# EAGLE board OpenServoCAN_Microcontroller_Board_V_1_0_1 (EAGLE 9.6.2)
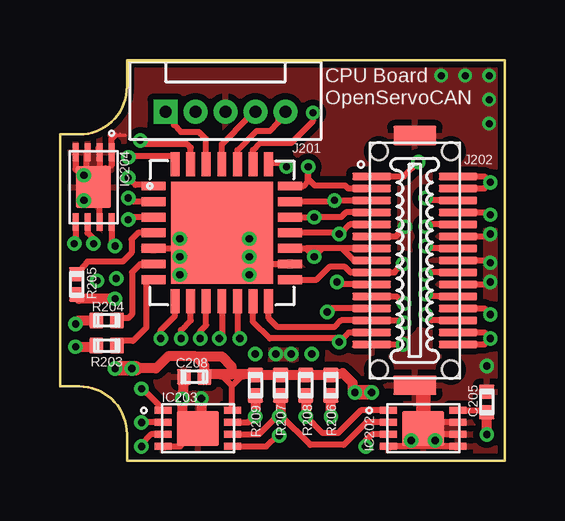
[diagram p0: board, top side]
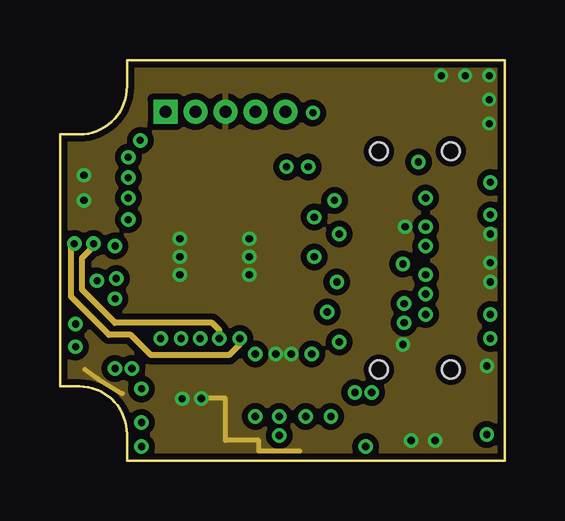
[diagram p1: board, inner layer Route2]
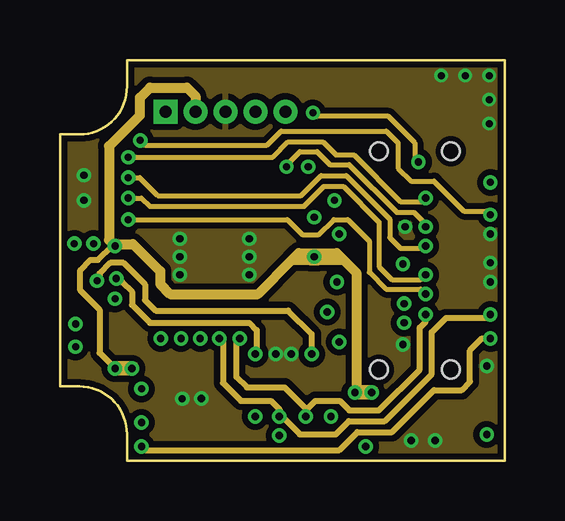
[diagram p2: board, inner layer Route15]
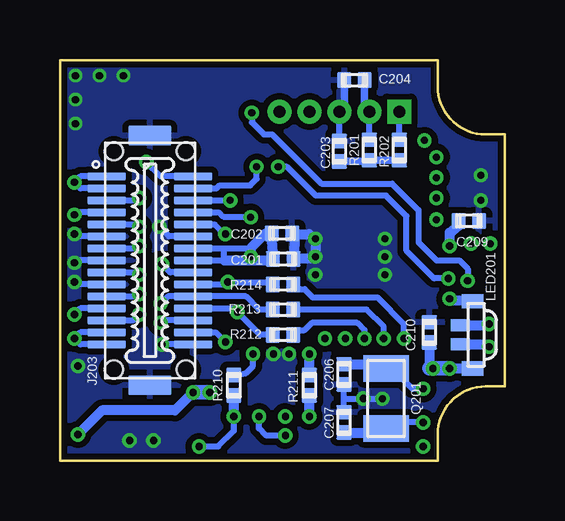
[diagram p3: board, bottom side, seen from below]

Size 18.55 x 16.7 mm. Coordinates in mm from the lower left corner, seen from the top.
Outline: 2.8,0 18.55,0 18.55,16.7 2.8,16.7 2.8,15.6 arc-90 0.8,13.6 0,13.6 0,3.1 0.8,3.1 arc-90 2.8,1.1 2.8,0
Copper layers (1+2*15+16): Top 0.018mm / dielectric 0.2mm / Route2 0.035mm / dielectric 0.36mm / Route15 0.035mm / dielectric 0.2mm / Bottom 0.018mm
Design rules "default *": minimum track width 6mil, minimum drill 0.3mm, track to track 6mil, track to pad 6mil, pad to pad 6mil, via to via 6mil, smd to smd 6mil, copper to edge 8mil, drill to drill 6mil, minimum pad ring 10mil, minimum via ring 5mil, stop-mask expansion 3mil, vias tented up to drill 15mil, thermal gap 10mil

## Footprints (pad centres in the part's own frame; a part is rotated, then mirrored left to right if it is on the bottom)
0402_C = smd 0.6 x 0.65: 1 -0.425,0; 2 0.425,0
QFN-28 = smd 1 x 0.37: 1 -2.85,1.95; 2 -2.85,1.3; 3 -2.85,0.65; 4 -2.85,0; 5 -2.85,-0.65; 6 -2.85,-1.3; 7 -2.85,-1.95; 15 2.85,-1.95; 16 2.85,-1.3; 17 2.85,-0.65; 18 2.85,0; 19 2.85,0.65; 20 2.85,1.3; 21 2.85,1.95 | smd 0.37 x 1: 8 -1.95,-2.85; 9 -1.3,-2.85; 10 -0.65,-2.85; 11 0,-2.85; 12 0.65,-2.85; 13 1.3,-2.85; 14 1.95,-2.85; 22 1.95,2.85; 23 1.3,2.85; 24 0.65,2.85; 25 0,2.85; 26 -0.65,2.85; 27 -1.3,2.85; 28 -1.95,2.85 | smd 4.25 x 4.25: EP 0,0
DFN_2X3_MICROCHIP = smd 0.75 x 0.3: 1 -1.45,0.75; 2 -1.45,0.25; 3 -1.45,-0.25; 4 -1.45,-0.75; 5 1.45,-0.75; 6 1.45,-0.25; 7 1.45,0.25; 8 1.45,0.75 | smd 1.75 x 1.45: EP 0,0
PICOBLADE-5 = drill 0.5 pad 0.813 square: 1 0,2.5 | drill 0.5 pad 0.813: 2 0,1.25; 3 0,0; 4 0,-1.25; 5 0,-2.5
10132798-30 = smd 1.6 x 0.3: 1 -1.8,3.5; 2 -1.8,3; 3 -1.8,2.5; 4 -1.8,2; 5 -1.8,1.5; 6 -1.8,1; 7 -1.8,0.5; 8 -1.8,0; 9 -1.8,-0.5; 10 -1.8,-1; 11 -1.8,-1.5; 12 -1.8,-2; 13 -1.8,-2.5; 14 -1.8,-3; 15 -1.8,-3.5; 16 1.8,-3.5; 17 1.8,-3; 18 1.8,-2.5; 19 1.8,-2; 20 1.8,-1.5; 21 1.8,-1; 22 1.8,-0.5; 23 1.8,0; 24 1.8,0.5; 25 1.8,1; 26 1.8,1.5; 27 1.8,2; 28 1.8,2.5; 29 1.8,3; 30 1.8,3.5 | smd 1.8 x 0.8: EP@2 0,-5.2; EP@↑1 0,5.2 | hole 0.75: -1.5,4.55; -1.5,-4.55
1206_RGB_LED = smd 0.8 x 0.5: 1 -0.5,-0.4; 2 -0.5,0.4 | smd 0.9 x 0.6: 3 0,-1.4; 4 0,1.4
LFXTAL009678 = smd 1.1 x 1.9: P$1 -1.25,0; P$2 1.25,0
0402_R = smd 0.6 x 0.65: 1 -0.425,0; 2 0.425,0

## Placement (x,y rotation side)
C201  100n  [0402_C]  9.24,8.41 0 bottom
C202  2u2  [0402_C]  9.29,9.48 0 bottom
C203  100n  [0402_C]  6.9,12.9 90 bottom
C204  100n  [0402_C]  6.27,15.86 180 bottom
C205  100n  [0402_C]  17.8,2.45 90 top
C206  22p  [0402_C]  6.7,3.6 270 bottom
C207  22p  [0402_C]  6.7,1.6 90 bottom
C208  100n  [0402_C]  5.6,3.5 180 top
C209  100n  [0402_C]  1.5,10 0 bottom
C210  100n  [0402_C]  3.15,5.35 90 bottom
IC201  [QFN-28]  6.75,9.5 0 top
IC202  MCP9808T-E/MC  [DFN_2X3_MICROCHIP]  15.15,1.35 0 top
IC203  MCP7940N  [DFN_2X3_MICROCHIP]  5.75,1.35 0 top
IC204  24XX64MC  [DFN_2X3_MICROCHIP]  1.4,11.4 270 top
J201  [PICOBLADE-5]  6.9,14.55 90 top
J202  1013279X-30PINR  [10132798-30]  14.8,8.35 0 top
J203  1013279X-30PINR  [10132798-30]  14.8,8.35 0 bottom
LED201  [1206_RGB_LED]  1.35,5.25 0 bottom
LOGO1  TRN_LOGO_INV  [TRN_LOGO_2020_INV]  1.3,0.85 0 top
Q201  LFXTAL009678  [LFXTAL009678]  4.95,2.6 90 bottom
R201  4k7  [0402_R]  5.65,12.95 90 bottom
R202  470  [0402_R]  4.4,12.95 270 bottom
R203  220  [0402_R]  1.95,4.8 0 top
R204  220  [0402_R]  1.95,5.85 0 top
R205  220  [0402_R]  0.7,7.35 90 top
R206  4k7  [0402_R]  11.3,3.15 90 top
R207  4k7  [0402_R]  9.2,3.15 90 top
R208  4k7  [0402_R]  10.25,3.15 90 top
R209  4k7  [0402_R]  8.15,3.15 90 top
R210  470  [0402_R]  11.3,3.15 90 bottom
R211  470  [0402_R]  8.15,3.15 90 bottom
R212  47  [0402_R]  9.25,5.25 180 bottom
R213  47  [0402_R]  9.25,6.3 0 bottom
R214  47  [0402_R]  9.25,7.35 0 bottom
U$1  CC-NC-BCNIX  [CC-NC-B_NIX]  -0.65,-16.5 0 top  (outside the outline)

## Library data of the parts
C201-C210 IC201-IC204 J201 LED201 LOGO1 Q201 R201-R214 = TRN_Open_Servo
J202 J203 = arm_project
U$1 = cc-by-nc-sa

## Nets
+3V3: J202.29 J202.30 J203.1 J203.2
+5V: C201.1 C202.1 C204.1 C205.1 C208.1 C209.1 C210.1 IC201.17 IC202.8 IC203.8 IC204.8 J201.2 J202.7 J202.8 J203.23 J203.24 LED201.3 R201.2 R206.2 R207.2 R208.2 R209.2
AN_CH_0: IC201.27 J202.27 J203.4
AN_CH_1: IC201.28 J202.28 J203.3
AN_CH_3: IC201.2 J202.22 J203.9
AN_CH_4: IC201.3 J202.20 J203.11
AUX_1: IC201.15 J202.9 J203.22
CAN_RX: IC201.13 J202.14 J203.17
CAN_TX: IC201.14 J202.13 J203.18
GND: C201.2 C202.2 C203.2 C204.2 C205.2 C206.2 C207.2 C208.2 C209.2 C210.2 IC201.5 IC201.16 IC201.EP IC202.4 IC202.5 IC202.6 IC202.7 IC202.EP IC203.4 IC203.EP IC204.1 IC204.2 IC204.3 IC204.4 IC204.7 IC204.EP J201.3 J202.6 J202.15 J202.21 J202.23 J202.25 J202.EP@2 J202.EP@↑1 J203.6 J203.8 J203.10 J203.16 J203.25 J203.EP@2 J203.EP@↑1
I2C1_SCL: IC201.11 IC202.2 IC203.6 IC204.6 J202.19 J203.12 R207.1
I2C1_SDA: IC201.12 IC202.1 IC203.5 IC204.5 J202.18 J203.13 R208.1
LED_B: IC201.7 R203.2
LED_G: IC201.6 R204.2
LED_R: IC201.4 R205.2
N$1: C203.1 R201.1 R202.2
N$2: IC201.26 J201.1 R202.1
N$3: IC201.24 J201.5
N$4: IC202.3 R206.1 R210.1
N$5: IC201.25 J201.4
N$7: LED201.2 R204.1
N$8: LED201.4 R205.1
N$9: LED201.1 R203.1
N$13: IC203.7 R209.1 R211.1
N$14: C206.1 IC203.1 Q201.P$2
N$15: C207.1 IC203.2 Q201.P$1
N$18: IC201.10 R212.1
N$19: IC201.9 R213.2
N$20: IC201.8 R214.2
POWER_EN: IC201.1 J202.24 J203.7
PWM_A: IC201.18 J202.5 J203.26
PWM_B: IC201.19 J202.4 J203.27
PWM_C: IC201.20 J202.3 J203.28
PWM_D: IC201.21 J202.2 J203.29
SPI_SCKL: J202.10 J203.21 R214.1
SPI_SDI: J202.12 J203.19 R212.2
SPI_SDO: J202.11 J203.20 R213.1
TEMP_ALRM: IC201.23 J202.1 J203.30 R210.2
TICK_ALRM: IC201.22 J202.26 J203.5 R211.2
VBAT: IC203.3 J202.16 J202.17 J203.14 J203.15

## Tracks (layer width: path | path; a pad name or v marks a point on that pad's centre or on a via)
+3V3  (via drill 0.3 pad 0.6)
  Top 0.254: J203.2 17.7,11.35 v17.95,11.6 17.7,11.85 J203.1
  Bottom 0.254: J203.2 17.7,11.35 v17.95,11.6 17.7,11.85 J203.1
+5V  (via drill 0.3 pad 0.6)
  Top 0.254: IC203.8 7.17,2.12 7.17,3.12 | 7.17,3.12 7.65,3.6 | 7.17,3.12 6.7,3.6 | IC201.17 10.25,8.85 | 10.25,8.85 v10.6,8.5 10.95,8.85 | J203.24 11.75,8.85 | 11.75,8.85 10.95,8.85 | 10.95,8.85 10.25,8.85 | J203.23 12.25,8.35 11.75,8.85 | IC204.8 2.15,9.1 v2.3,8.95 | IC202.8 17.8,2.1 C205.1
  Top 0.406: 7.15,3.6 7.65,3.6 8.1,3.6 R209.2 R207.2 R208.2 R206.2 11.8,3.65 12.2,3.25 12.2,2.95 v12.3,2.85 | 7.15,3.6 6.7,3.6 6.2,3.6 C208.1 6.02,3.97 5.65,4.35 | 3.15,3.85 4,3.85 4.5,4.35 5.65,4.35 | 5.65,4.35 6.75,4.35 7.15,3.95 7.15,3.6 | v17.8,1.1 C205.1
  Top 0.61: v2.3,3.85 v3,3.85 3.15,3.85 | v13,2.85 v12.3,2.85
  Route15 0.254: v2.3,3.85 1.65,4.5 1.65,6.3 0.85,7.1 0.85,7.95 1.27,8.37 1.59,8.37 2.17,8.95 v2.3,8.95
  Route15 0.406: v12.3,2.85 12.36,2.91 12.36,7.84 11.85,8.35 | 11.85,8.35 10.75,8.35 | 10.75,8.35 v10.6,8.5 10.45,8.35 | 10.45,8.35 9.65,8.35 | 9.65,8.35 8.25,6.95 4.6,6.95 4.18,7.37 4.18,7.9 3.05,9.03 2.38,9.03 v2.3,8.95 2.05,9.2 2.05,13.11 3.33,14.4 3.33,15.13 3.75,15.55 5.3,15.55 5.65,15.2 J201.2 | 10.45,8.35 10.75,8.35 | 9.65,8.35 9.95,8.65 11.55,8.65 11.85,8.35
  Route15 0.61: v2.3,3.85 v3,3.85 | v12.3,2.85 v13,2.85
  Bottom 0.254: J203.24 11.65,8.85 | 11.65,8.85 10.6,8.85 | J203.23 11.7,8.35 11.7,8.8 11.65,8.85 | R201.2 J201.2 5.77,14.67
  Bottom 0.305: J201.2 5.84,14.74 C204.1
  Bottom 0.406: v2.3,3.85 LED201.3 | v10.6,8.5 10.6,8.85 9.97,9.48 C202.1 9.74,9.43 C201.1 9.8,8.35 11.7,8.35 | v13,2.85 13.75,2.1 16.8,2.1 v17.8,1.1 | C210.1 3.15,3.85 | v2.3,8.95 2.3,9.51 1.93,9.81 C209.1
  Bottom 0.61: v2.3,3.85 v3,3.85 3.15,3.85 | v13,2.85 v12.3,2.85
AN_CH_0  (via drill 0.3 pad 0.6)
  Top 0.254: IC201.27 5.45,13.05 5.3,13.2 3.5,13.2 v3.35,13.35 | J203.4 17.85,10.35 v17.95,10.25
  Route15 0.203: v3.35,13.35 3.55,13.15 8.63,13.15 9.22,13.74 13.61,13.74 14.1,13.25 14.1,12.2 14.65,11.65 15.6,11.65 16.85,10.4 17.8,10.4 v17.95,10.25
  Bottom 0.254: J203.4 17.85,10.35 v17.95,10.25
AN_CH_1  (via drill 0.3 pad 0.6)
  Top 0.254: v2.85,12.65 2.9,12.7 4.7,12.7 4.8,12.6 IC201.28 | J203.3 15.35,10.85 v15.25,10.95
  Route15 0.203: v2.85,12.65 8.88,12.65 9.52,13.29 10.96,13.29 11.5,12.75 12.25,12.75 14.2,10.8 15.1,10.8 v15.25,10.95
  Bottom 0.254: J203.3 15.35,10.85 v15.25,10.95
AN_CH_3  (via drill 0.3 pad 0.6)
  Top 0.254: IC201.2 3,10.8 v2.85,10.95 | J203.9 15.35,7.85 v15.25,7.75
  Route15 0.203: v2.85,10.95 3.4,10.95 3.75,10.6 10.18,10.6 11.01,11.43 11.82,11.43 13.31,9.94 13.31,8.09 13.85,7.55 15.05,7.55 v15.25,7.75
  Bottom 0.254: J203.9 15.35,7.85 v15.25,7.75
AN_CH_4  (via drill 0.3 pad 0.6)
  Top 0.254: IC201.3 2.95,10.15 v2.85,10.05 | J203.11 15.35,6.85 v15.25,6.95
  Route15 0.203: v2.85,10.05 9.48,10.05 10.11,9.42 10.79,9.42 11.42,10.05 12,10.05 12.9,9.15 12.9,7.85 13.6,7.15 15.05,7.15 v15.25,6.95
  Bottom 0.254: J203.11 15.35,6.85 v15.25,6.95
AUX_1  (via drill 0.3 pad 0.6)
  Top 0.254: v14.3,8.2 13.95,7.85 J203.22 12.12,7.85 11.89,8.08 11.23,8.08 10.7,7.55 IC201.15
  Bottom 0.254: J203.22 13.95,7.85 v14.3,8.2
CAN_RX  (via drill 0.3 pad 0.6)
  Top 0.254: J203.17 12.05,5.35 v11.65,4.95 11.5,5.1 8.75,5.1 8.05,5.8 IC201.13
  Bottom 0.254: J203.17 12.05,5.35 v11.65,4.95
CAN_TX  (via drill 0.3 pad 0.6)
  Top 0.254: v14.35,5.75 14.25,5.85 J203.18 11.72,5.85 11.44,5.57 9.08,5.57 8.7,5.95 IC201.14
  Bottom 0.254: J203.18 14.25,5.85 v14.35,5.75
GND  (via drill 0.3, 0.3 pad 0.6)
  Top 0.152: 2.47,13.57 2.5,13.6 | IC204.2 1.55,12.95 1.55,13.05 | 2.07,13.57 2.3,13.57 2.47,13.57 | 2.47,13.57 2.72,13.57
  Top 0.254: 15.4,1.65 IC202.EP | 15.4,1.15 IC202.EP | IC202.5 IC202.4 | 14.9,0.65 14.9,1.35 IC202.EP | IC201.5 6.1,8.85 IC201.EP 8.05,8.2 IC201.16 | IC202.7 15.4,1.6 IC202.EP | IC202.6 15.4,1.1 IC202.EP | IC203.4 5,0.6 IC203.EP | J203.16 v14.3,4.85 | IC204.3 1.1,12.8 1.1,11.55 1.15,11.6 1.15,11.45 1.4,11.7 | 1.4,11.7 IC204.EP | IC204.2 1.65,11.85 | 2.15,12.3 IC204.1 2.15,13.43 2.3,13.57 | 1.9,12.2 1.4,11.7 | IC204.4 0.65,12.15 IC204.EP | IC204.7 1.65,11.15 IC204.EP | J203.25 14,9.35 v14.4,9.75 | J203.8 17.85,8.35 v17.95,8.25 | J203.10 17.85,7.35 v17.95,7.45 | J203.6 17.85,9.35 v17.95,9.45
  Top 0.406: IC203.EP 5.1,2 v5.1,2.59 C208.2 | IC203.EP 5.35,1.75 5.2,1.75 | v5.9,2.6 5.9,1.5 IC203.EP
  Top 0.61: IC202.EP 15.15,3.15 J202.EP@2
  Route2 0.2: 8.3,0.4 8.3,0.85 6.9,0.85 6.9,2.6 v5.9,2.6
  Route2 0.203: 10,0.4 8.3,0.4 | 2.6,2.8 1.6,3.4 1.05,3.8
  Bottom 0.254: C207.2 6.7,2.59 | 6.7,2.59 C206.2 | 6.7,2.59 v5.1,2.59 | J203.16 v14.3,4.85 | C203.2 J201.3 6.77,14.68 | J203.25 14,9.35 v14.4,9.75 | J203.8 17.85,8.35 v17.95,8.25 | J203.10 17.85,7.35 v17.95,7.45 | J203.6 17.85,9.35 v17.95,9.45
  Bottom 0.305: J201.3 6.69,14.75 C204.2
  Bottom 0.406: v7.9,8.5 7.91,8.41 C201.2 8.74,9.43 C202.2 8.76,9.45 8.15,9.45 v7.9,9.25 v7.9,8.5
  other vias: 5,7.75 5,8.5 5,9.25 1,10.85 1,11.9 14.65,0.85 15.65,0.85 17.8,3.95 16.9,16.05 17.9,16.05 17.9,15.05 17.9,14.05 15.9,16.05 7.9,7.75 9,4.45 9.65,4.45
  pour Route2 (isolate 0.254): 18.6,-0.05 18.6,16.75 -0.3,16.75 -0.3,-0.05
  pour Top (isolate 0.254): 18.6,-0.05 18.6,16.75 -0.2,16.75 -0.2,-0.05
  pour Bottom (isolate 0.254): 18.6,-0.05 -0.3,-0.05 -0.3,16.75 18.6,16.75
  pour Route15 (isolate 0.254): 18.6,-0.05 18.6,16.75 -0.2,16.75 -0.3,16.75 -0.3,-0.05 3.4,-0.05
I2C1_SCL  (via drill 0.3 pad 0.6)
  Top 0.254: 9.2,1.9 10.44,0.66 11.84,0.66 12.78,1.6 IC202.2 | 9.2,1.85 9.15,1.9 | IC203.6 8.3,1.1 9.05,1.85 v9.15,1.85 | IC201.11 6.75,5.2 v6.65,5.1 | J203.12 17.7,6.35 v17.95,6.1 | IC204.6 1.15,9.5 1.4,9.25 v1.4,9.05
  Top 0.406: R207.1 9.2,1.9 9.2,1.85 | 9.15,1.9 v9.15,1.85
  Route2 0.254: v6.65,5.1 6.65,5.45 6.35,5.75 2.3,5.75 0.92,7.13 0.92,8.45 1.4,8.93 v1.4,9.05
  Route15 0.254: v6.65,5.1 6.7,5.1 6.8,5 6.8,3.25 7.55,2.5 8.8,2.5 9.15,2.15 v9.15,1.85 9.25,1.85 10,1.1 11.5,1.1 12.05,1.65 13.55,1.65 15.51,3.61 15.51,5.36 16.1,5.95 17.8,5.95 v17.95,6.1
  Bottom 0.254: J203.12 17.7,6.35 v17.95,6.1
I2C1_SDA  (via drill 0.3 pad 0.6)
  Top 0.254: IC202.1 12.55,2.1 11.6,1.15 10.95,1.15 v10.25,1.85 | IC203.5 8.6,0.6 9.05,1.05 v9.15,1.05 | IC201.12 7.4,5.2 v7.5,5.1 | J203.13 15.5,5.85 v15.25,6.1 | IC204.5 0.65,9.1 v0.6,9.05
  Top 0.406: R208.1 v10.25,1.85
  Route2 0.254: v7.5,5.1 7.5,4.85 7.05,4.4 3.8,4.4 2.95,5.25 2.05,5.25 0.45,6.85 0.45,8.9 v0.6,9.05
  Route15 0.254: v7.5,5.1 7.35,4.95 7.35,3.5 7.79,3.06 9.37,3.06 10.25,2.17 v10.25,1.85 | 10.28,1.82 v10.25,1.85 | v10.25,1.85 10.25,2.1 10.65,2.5 11.67,2.5 12.07,2.1 13.3,2.1 15,3.8 15,5.55 15.25,5.8 v15.25,6.1
  Bottom 0.254: v9.15,1.05 9.95,1.05 10.25,1.35 v10.25,1.85 | J203.13 15.5,5.85 v15.25,6.1
LED_B
  Top 0.254: IC201.7 3.75,7.55 3.6,7.4 3.6,5.55 3.05,5 2.65,5 R203.2
LED_G
  Top 0.254: IC201.6 3.35,8.2 3,7.85 3,6.1 2.85,5.95 2.55,5.95 R204.2
LED_R
  Top 0.254: IC201.4 3.25,9.5 2.98,9.23 2.98,8.66 2.62,8.3 1.15,8.3 R205.2
N$1
  Bottom 0.254: R201.1 5.7,12.4
  Bottom 0.305: R202.2 R201.1 5.7,12.47 C203.1
N$2
  Top 0.254: IC201.26 6.1,13.4 5.8,13.7 5.05,13.7 4.75,14 4.75,14.2 J201.1
  Bottom 0.254: R202.1 J201.1
N$3
  Top 0.254: IC201.24 7.4,12.95 8.2,13.75 8.75,13.75 9.1,14.1 9.1,14.3 9.35,14.55 J201.5
N$4  (via drill 0.3 pad 0.6)
  Top 0.254: IC202.3 13,1.1 12.65,0.75 12.65,0.7 v12.75,0.6
  Top 0.406: v11.3,1.85 R210.1
  Bottom 0.254: v12.75,0.6 11.95,0.6 11.3,1.25 v11.3,1.85
  Bottom 0.406: v11.3,1.85 R210.1
N$5
  Top 0.254: J201.4 8,14.55 7.85,14.4 7.85,14.3 6.75,13.2 IC201.25
N$7  (via drill 0.3 pad 0.6)
  Top 0.406: v0.65,5.7 0.8,5.85 R204.1
  Bottom 0.406: LED201.2 0.7,5.65 v0.65,5.7
N$8  (via drill 0.3 pad 0.6)
  Top 0.254: R205.1 0.8,6.75
  Top 0.406: v2.3,6.75 0.8,6.75
  Bottom 0.254: 1.4,6.7 LED201.4
  Bottom 0.406: v2.3,6.75 2.25,6.7 1.4,6.7
N$9  (via drill 0.3 pad 0.6)
  Top 0.406: v0.65,4.75 1.4,4.75 R203.1
  Bottom 0.406: LED201.1 0.75,4.85 v0.65,4.75
N$13  (via drill 0.3 pad 0.6)
  Top 0.254: IC203.7 7.85,1.6 8.15,1.9 v8.15,1.85
  Top 0.406: R211.1 v8.15,1.85
  Bottom 0.406: v8.15,1.85 R211.1
N$14  (via drill 0.3 pad 0.6)
  Top 0.254: IC203.1 4.2,2.1 4.1,2.2 4.1,2.35 3.6,2.85 3.4,2.85 v3.4,3
  Bottom 0.254: v3.4,3 3.85,3 4.2,3.35 4.2,3.5 4.55,3.85 Q201.P$2 5.02,3.92 5.2,4.1
  Bottom 0.406: C206.1 5.12,4.02 5.02,3.92
N$15  (via drill 0.3 pad 0.6)
  Top 0.254: IC203.2 v3.4,1.6
  Bottom 0.254: v3.4,1.6 4.2,1.6 4.2,1.35 Q201.P$1 5.2,1.1
  Bottom 0.406: C207.1 5.12,1.17 Q201.P$1
N$18  (via drill 0.3 pad 0.6)
  Top 0.254: v5.85,5.1 5.85,5.4 6.1,5.65 IC201.10
  Bottom 0.254: v5.85,5.1 5.85,5.45 6.15,5.75 8.05,5.75 8.35,5.45 8.55,5.45 R212.1
N$19  (via drill 0.3 pad 0.6)
  Top 0.254: v5.05,5.1 5.05,5.45 5.45,5.85 IC201.9
  Bottom 0.254: v5.05,5.1 5.05,5.6 5.75,6.3 R213.2
N$20  (via drill 0.3 pad 0.6)
  Top 0.254: 4.8,6.75 IC201.8 4.8,6.05 4.2,5.45 v4.2,5.1
  Bottom 0.254: v4.2,5.1 4.2,5.7 5.3,6.8 8,6.8 8.35,7.15 8.55,7.15 R214.2
POWER_EN  (via drill 0.3 pad 0.6)
  Top 0.152: IC201.1 3.85,11.5
  Top 0.254: 3.85,11.5 3.15,11.5 v2.85,11.8 | J203.7 15.35,8.85 v15.25,8.95
  Route15 0.203: v2.85,11.8 3.32,11.8 4.08,11.05 10.06,11.05 10.89,11.89 11.94,11.89 13.75,10.07 13.75,9.3 14.2,8.85 15.15,8.85 v15.25,8.95
  Bottom 0.254: J203.7 15.35,8.85 v15.25,8.95
PWM_A  (via drill 0.3 pad 0.6)
  Top 0.254: IC201.18 11.6,9.5 v11.65,9.45 11.7,9.45 12.1,9.85 J203.26
  Bottom 0.254: J203.26 12.1,9.85 11.7,9.45 v11.65,9.45
PWM_B  (via drill 0.3 pad 0.6)
  Top 0.254: IC201.19 v10.6,10.15 11.72,10.15 11.92,10.35 J203.27
  Bottom 0.254: J203.27 11.92,10.35 11.74,10.17 10.6,10.17 v10.6,10.15
PWM_C  (via drill 0.3 pad 0.6)
  Top 0.254: IC201.20 11.4,10.8 v11.45,10.85 J203.28
  Bottom 0.254: J203.28 v11.45,10.85
PWM_D  (via drill 0.3 pad 0.6)
  Top 0.254: IC201.21 10.15,11.45 10.35,11.65 v10.35,12.25 10.35,11.75 10.62,11.48 11.89,11.48 12.02,11.35 J203.29
  Bottom 0.254: J203.29 12.02,11.35 11.89,11.48 10.62,11.48 10.35,11.75 v10.35,12.25
SPI_SCKL  (via drill 0.3 pad 0.6)
  Top 0.254: J203.21 11.65,7.35 v11.55,7.45
  Bottom 0.254: J203.21 11.65,7.35 v11.55,7.45 9.85,7.45 R214.1
SPI_SDI  (via drill 0.3 pad 0.6)
  Top 0.254: J203.19 11.3,6.35 v11.15,6.2
  Bottom 0.254: J203.19 11.3,6.35 | 11.3,6.35 v11.15,6.2 10.2,5.25 R212.2 | 11.1,6.35 11.3,6.35
SPI_SDO  (via drill 0.3 pad 0.6)
  Top 0.254: J203.20 14.05,6.85 v14.35,6.55
  Bottom 0.254: v14.35,6.55 14.05,6.85 J203.20 10.8,6.85 10.25,6.3 R213.1
TEMP_ALRM  (via drill 0.3 pad 0.6)
  Top 0.254: J203.30 14.35,11.85 v14.95,12.45 | IC201.23 8.05,12.95 8.35,13.25 9.65,13.25 10.55,14.15 v10.55,14.5
  Route15 0.203: v10.55,14.5 10.7,14.35 13.7,14.35 14.8,13.25 14.8,12.6 v14.95,12.45
  Route15 0.254: v10.5,4.45 10.5,5.27 9.52,6.26 3.99,6.26 3.55,6.7 3.55,7.35 2.65,8.25 2.1,8.25 1.65,7.8 1.65,7.6 v1.55,7.5
  Bottom 0.254: v10.55,14.5 10.55,14.1 10.05,13.6 9.7,13.6 7.65,11.55 4.7,11.55 3.6,10.45 3.6,9.1 2.85,8.35 1.9,8.35 1.55,8 v1.55,7.5 | R210.2 10.8,3.65 10.5,3.95 v10.5,4.45 | J203.30 14.35,11.85 v14.95,12.45
TICK_ALRM  (via drill 0.3 pad 0.6)
  Top 0.254: 8.7,12.6 IC201.22 8.75,12.4 9.35,12.4 9.45,12.3 v9.45,12.25 | J203.5 15.35,9.85 v15.25,9.75
  Route15 0.203: 9.45,12.32 10.01,12.88 10.72,12.88 11.26,12.34 12.06,12.34 14.05,10.35 14.75,10.35 15.25,9.85 v15.25,9.75
  Route15 0.254: v2.35,7.6 2.5,7.45 2.6,7.45 3,7.05 3,6.5 3.75,5.75 7.9,5.75 8.2,5.45 8.2,4.5 v8.15,4.45 | v9.45,12.25 9.45,12.32
  Bottom 0.254: 9.4,12.2 v9.45,12.25 9.08,12.25 7.87,11.05 4.95,11.05 4.1,10.2 4.1,8.75 2.95,7.6 v2.35,7.6 | J203.5 15.35,9.85 v15.25,9.75
  Bottom 0.406: R211.2 v8.15,4.45
VBAT  (via drill 0.3 pad 0.6)
  Top 0.254: IC203.3 3.8,1.1 3.4,0.7 v3.4,0.6 | J203.14 17.7,5.35 v17.95,5.1 17.7,4.85 J203.15
  Route15 0.254: v3.4,0.6 arc90 3.55,0.45 11.65,0.45 12.4,1.2 13.85,1.2 15.6,2.95 16.75,2.95 17.1,3.3 17.1,4.6 17.6,5.1 v17.95,5.1
  Bottom 0.254: J203.14 17.7,5.35 v17.95,5.1 17.7,4.85 J203.15

## Text on the board
tPlace: CPU Board / OpenServoCAN